# Altium PCB Dual-MCU-control-board.PcbDoc (part 2 of 3)
Units mm, origin at the board's own origin, x right, y up, seen from the top; angles counter-clockwise.
Board outline 69.24 x 57.01 mm, 4 copper layers (L1 SIGNAL, L2 GROUND, L3 GROUND, L4 SIGNAL), stack 1.571 mm thick; 90 components, 69 nets, 374 pads, 126 vias.
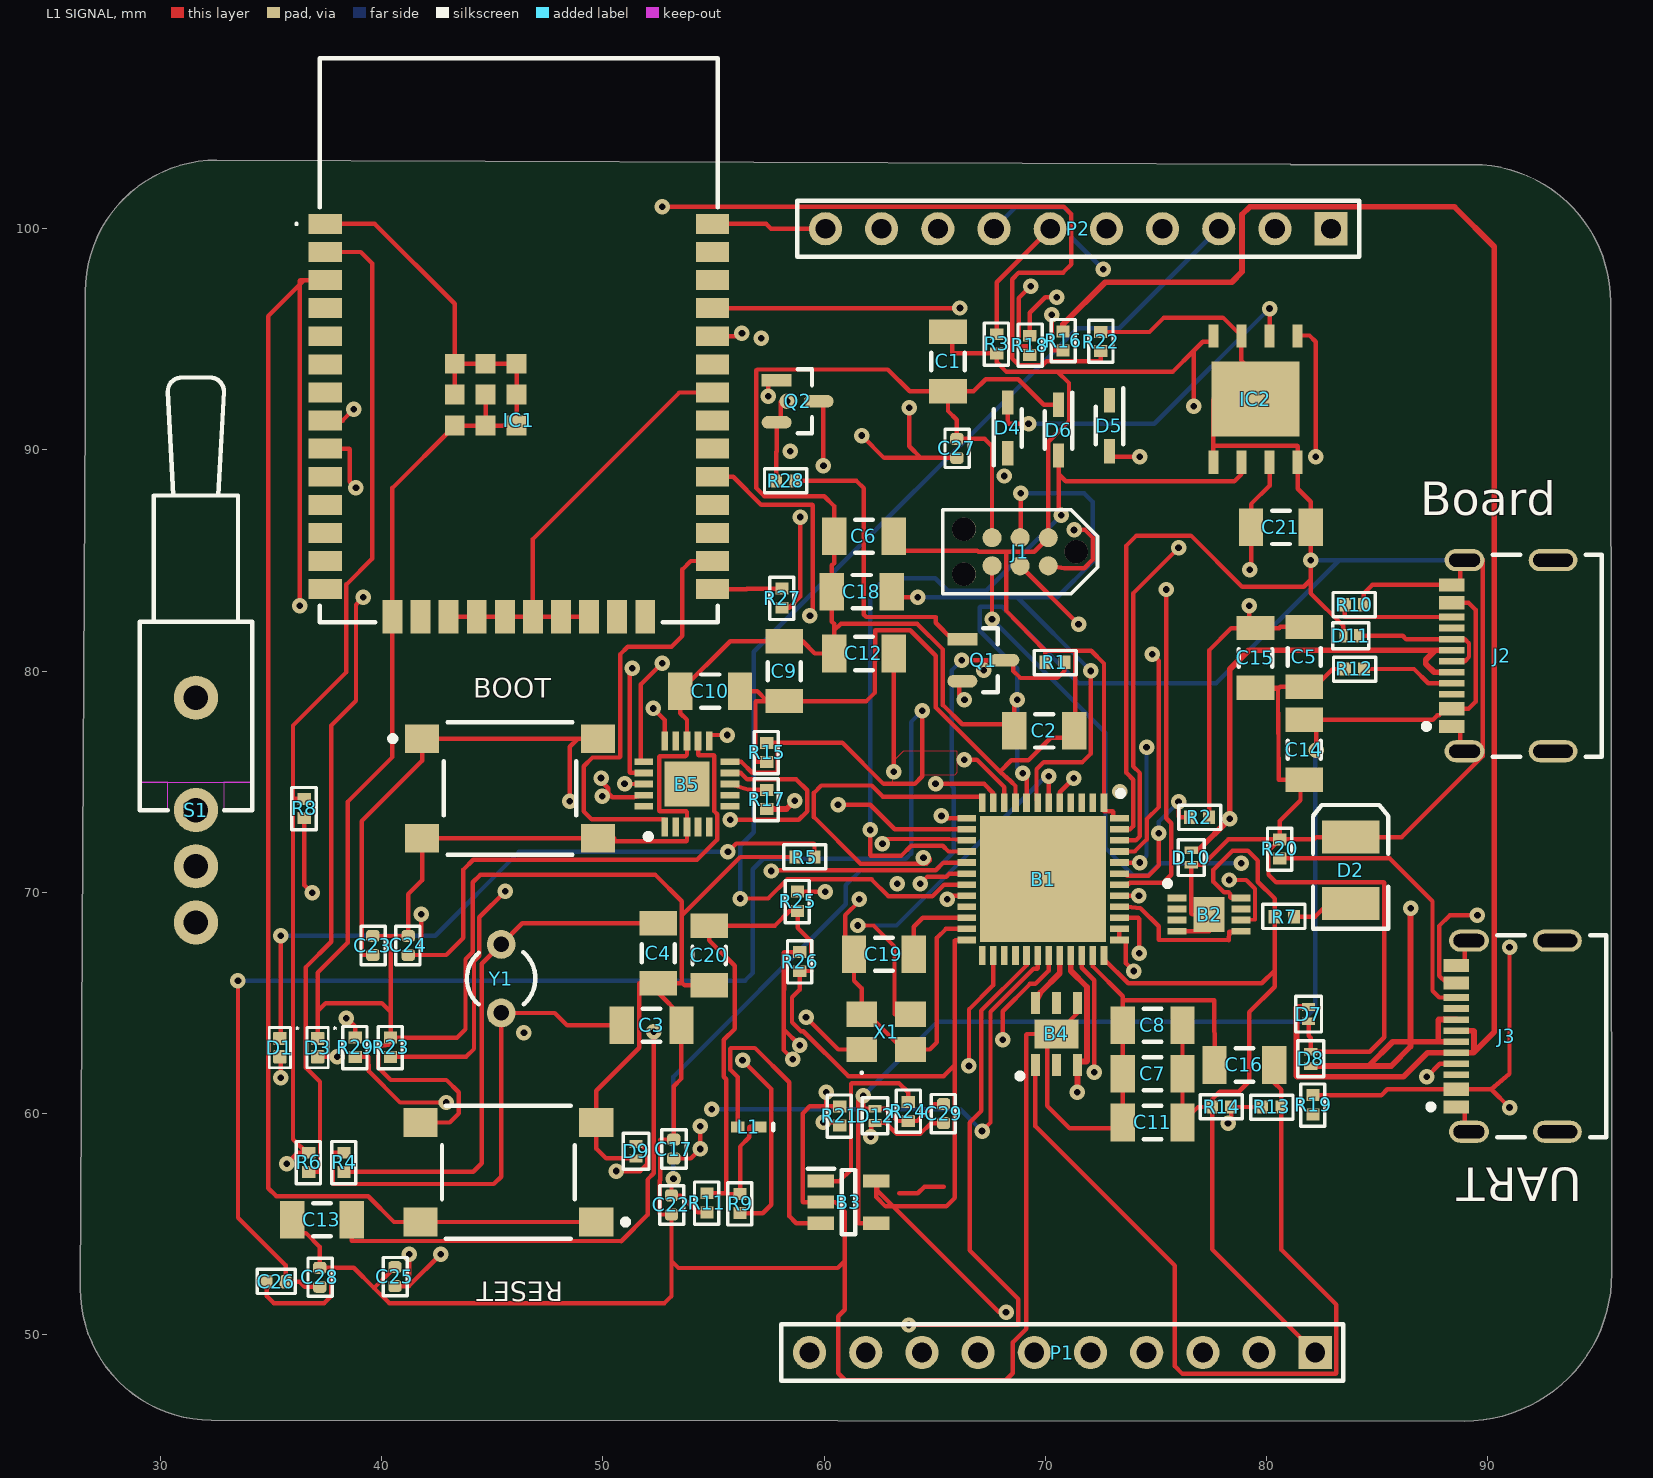
[diagram p0: L1 SIGNAL view]

## Via types
v1: diameter 0.7, hole 0.3, L1 SIGNAL to L4 SIGNAL, 126 vias

## Nets (pads, with @x,y where several pads share a name; then routed paths per layer and width w, separated by ;. In a path a pad name is that pad's centre, name@x,y a point inside that pad or via, vN(x,y) a via of type N, cw(c..) or ccw(c..) an arc to the next point about the centre after c; other vN are vias at no path point) (continued)
+3V3: (continued)
  L1 SIGNAL w0.2: v1(35.712,57.734) 36.21,58.232 R6.2@36.601,58.232 ; R8.2@36.5,74.232 36.017,74.232 35.992,74.207 ; R6.2@36.7,58.232 R6.2@36.612,58.232 ; IC1.2@37.45,98.95 39.052,98.95 39.573,98.429 39.573,85.09 38.405,83.922 38.405,79.959 35.992,77.546 35.992,74.207 ; R11.2@54.7,56.4 55.575,56.4 ; C10.2@56.2,79.1 56.972,79.1 57.422,78.65 56.921,78.65 56.896,78.625 56.896,75.925 56.921,75.9 R15.1@57.4,75.9 ; L1.1@57.1,59.4 56.642,59.4 56.617,59.375 56.617,58.928 56.2,58.511 R9.2@56.2,56.364 55.575,56.389 55.573,56.486 55.575,56.488 55.575,61.558 55.462,61.671 55.462,63.336 55.956,63.83 55.956,66.679 55.96,66.683 54.8,67.843 C20.2@54.8,68.5 57.777,68.5 58.445,69.168 R25.1@58.8,69.168 58.8,68.403 59.411,67.793 59.411,66.461 R26.1@58.9,66.436 58.9,65.608 58.547,65.255 58.547,64.135 58.953,63.729 59.055,63.729 61.087,61.697 65.405,61.697 65.913,62.205 ; C9.2@58.2,78.65 61.912,78.65 62.281,79.018 62.306,81.85 63.895,81.85 65.049,80.696 65.049,78.359 67.949,75.459 ; C6.2@63.15,86.1 63.15,85.453 66.927,85.453 66.98,85.4 68.224,85.4 ; C1.2@65.6,95.35 65.786,95.35 65.786,94.393 65.811,94.368 R3.1@67.8,94.368 67.8,93.973 68.243,93.53 70.567,93.53 ; B1.24@66.45,67.85 65.938,67.85 65.913,67.825 65.913,62.205 ; v1(68.224,51.016) 67.907,51.016 63.119,55.804 ; B1.9@68.65,74.05 68.65,74.812 68.436,75.025 67.949,75.459 ; R1.2@70,80.4 70,80.924 ; B1.36@72.65,67.15 72.65,66.98 73.742,65.888 79.781,65.888 80.368,66.474 ; B1.48@73.35,73.35 73.076,73.35 73.076,73.635 73.05,73.66 72.65,73.66 B1.1@72.65,74.05 72.65,80.347 72.072,80.924 71.349,80.924 ; C8.2@76.2,64 C7.2@76.2,61.8 C11.2@76.2,59.6 76.9,60.3 R14.1@77.536,60.3 ; v1(76.708,91.973) 76.708,94.488 ; R2.1@77.4,73.4 77.4,80.94 78.41,81.95 C15.2@79.223,81.95 ; IC2.8@77.595,95.15 77.595,94.894 77.114,94.894 76.708,94.488 ; B2.8@78.85,69.75 78.384,69.75 78.359,69.775 78.359,69.926 78.283,70.002 78.08,70.002 77.597,70.485 77.597,71.018 78.461,71.882 79.159,71.882 79.604,71.438 79.604,70.485 80.368,69.721 R7.1@80.368,68.9 80.368,66.474 ; v1(79.223,82.956) C15.2@79.223,81.95 ; C5.2@81.7,82 80.619,82 80.569,81.95 C15.2@79.5,81.95 C15.2@79.223,81.95 ; P1.1@82.2,49.2 77.536,53.864 R14.1@77.536,60.3 ; 35.992,58.852 35.992,74.207 ; 35.992,58.852 35.992,58.842 R6.2@36.601,58.232 ; 35.992,58.852 R6.2@36.612,58.232 ; R6.2@36.601,58.232 R6.2@36.612,58.232 ; 63.119,55.804 65.519,55.804 65.913,56.197 65.913,62.205 ; 63.119,55.804 62.776,55.804 62.35,56.23 B3.5@62.35,56.95 62.408,56.95 62.408,56.515 63.119,55.804 ; 67.949,75.459 68.462,75.971 69.234,75.971 70.25,76.987 71.3,76.987 C2.2@71.3,77.3 71.349,77.3 71.349,80.924 ; 68.224,85.4 69.495,85.4 J1.1@70.13,86.035 70.13,90.374 71.069,91.313 71.069,93.027 70.567,93.53 ; 68.224,85.4 68.224,82.738 70,80.924 ; 70,80.924 71.349,80.924 ; 70.567,93.53 75.75,93.53 76.708,94.488 ; R14.1@77.536,60.3 77.536,60.642 77.879,60.985 78.74,60.985 79.223,61.468 79.223,64.59 80.368,65.735 80.368,66.474
  L2 GROUND w0.2: v1(35.712,57.734) 40.538,52.908 78.492,52.908 80.702,50.698 ; v1(68.224,51.016) 68.542,50.698 80.702,50.698 ; P1.1@82.2,49.2 80.702,50.698
  L3 GROUND w0.2: v1(79.223,82.956) 76.708,85.471 v1(76.708,91.973) 82.804,85.877 P1.1@82.804,49.92 ; P1.1@82.2,49.2 82.804,49.804 P1.1@82.804,49.92 ; P2.1@82.92,100 82.92,49.92 P1.1@82.804,49.92
+5V: B4.1 C16.2 R13.1 | length 38.8
  L1 SIGNAL w0.2: B4.1@69.55,62.2 69.55,59.431 75.857,53.124 75.857,48.578 76.2,48.235 83.134,48.235 83.16,48.26 83.16,51.359 80.664,53.854 R13.1@80.664,60.3 80.664,61.087 80.35,61.401 C16.2@80.35,62.2
+5V_VBUS1: C17.1 D9.2 J3.A4B9 J3.B4A9 R19.2 | length 70.5
  L1 SIGNAL w0.2: v1(50.597,57.404) 51.689,57.404 52,57.715 52,58.318 51.694,58.625 D9.2@51.5,58.625 ; C17.1@53.2,57.97 53.973,57.97 v1(54.407,58.403) v1(54.407,59.436) ; R19.2@82.1,60.832 85.192,60.832 85.46,61.1 J3.A4B9@88.575,61.1 90.157,61.1 ; J3.B4A9@88.575,65.9 88.133,65.9 87.8,66.233 87.8,68.482 88.279,68.961 v1(89.535,68.961) ; v1(90.983,60.274) 90.157,61.1 ; v1(90.983,67.513) 90.983,61.798 90.157,61.1
  L2 GROUND w0.2: v1(50.597,57.404) 52.629,59.436 v1(54.407,59.436) ; v1(54.407,58.403) 64.271,58.403 66.142,60.274 v1(90.983,60.274) ; v1(89.535,68.961) v1(90.983,67.513)
+VCC_FTDI: B5.12 C24.2 C25.1 R13.2 R14.2 | length 84.9
  L1 SIGNAL w0.2: C25.1@40.6,52.2 41.224,52.2 41.25,52.225 ; C24.2@41.2,67.17 41.758,67.17 ; v1(41.25,53.645) 41.25,52.225 ; v1(41.783,69.012) 41.783,67.195 41.758,67.17 ; v1(42.669,53.645) 41.25,52.225 ; B5.12@54.3,76.85 54.3,76.225 54.325,76.2 55.016,76.2 55.042,76.175 55.042,73.66 55.169,73.533 55.169,72.39 54.254,71.476 44.133,71.476 43.693,71.036 43.693,67.945 42.918,67.17 41.758,67.17 ; v1(78.257,59.563) 78.4,59.706 R14.2@78.4,60.3 R13.2@79.8,60.3
  L2 GROUND w0.2: v1(42.669,53.645) 72.339,53.645 v1(78.257,59.563)
  L3 GROUND w0.2: v1(41.25,53.645) 41.25,68.478 v1(41.783,69.012)
BOOT0: B1.44 BOOT.1 BOOT.2 C23.1 | length 61
  L1 SIGNAL w0.2: C23.1@39.6,67.17 39.116,67.17 39.091,67.195 39.091,73.212 41.825,75.946 BOOT.1@41.825,76.95 48.87,76.95 ; v1(48.505,74.117) 48.505,76.585 48.87,76.95 ; BOOT.2@49.775,76.95 48.87,76.95 ; B1.44@73.35,71.35 v1(74.271,71.35)
  L2 GROUND w0.2: v1(48.505,74.117) 53.622,69 56.478,69 61.9,74.422 61.9,76.225 62.23,76.556 v1(74.574,76.556)
  L4 SIGNAL w0.2: v1(74.271,71.35) 74.574,71.653 v1(74.574,76.556)
BTN_GPIO0: Q2.3 R27.1 | length 10.5
  L1 SIGNAL w0.2: R27.1@58.1,82.868 58.42,82.868 58.928,83.376 v1(58.928,86.97) ; Q2.3@59.751,92.2 59.969,92.2 v1(59.969,89.281)
  L2 GROUND w0.2: v1(58.928,86.97) 59.969,88.011 v1(59.969,89.281)
CHIP_PU: C22.2 IC1.3 Q1.3 R1.1 R11.1 RESET.1 RESET.2 | length 146.7
  L1 SIGNAL w0.2: v1(36.297,82.956) 36.297,97.477 ; IC1.3@37.45,97.68 36.5,97.68 ; RESET.1@49.7,55.1 RESET.2@41.75,55.1 40.556,55.1 39.395,56.261 35.242,56.261 34.874,56.629 34.874,96.054 36.297,97.477 ; v1(53.188,57.048) 53.1,56.961 C22.2@53.1,56.3 53.518,56.3 54.282,55.536 R11.1@54.7,55.536 ; v1(66.225,80.5) 67.361,80.5 ; v1(67.208,80.035) 67.208,80.348 67.361,80.5 ; R1.1@70.864,80.4 70.864,80.01 70.547,79.692 68.872,79.692 68.555,80.01 68.555,80.5 Q1.3@68.151,80.5 67.361,80.5 ; 36.297,97.477 36.5,97.68 ; 36.297,97.477 36.297,97.655 36.322,97.68 36.5,97.68
  L2 GROUND w0.2: v1(36.297,82.956) 37.236,83.896 64.795,83.896 67.208,81.483 v1(67.208,80.035)
  L4 SIGNAL w0.2: v1(53.188,57.048) 53.188,61.671 60.981,69.465 60.981,70.333 61.663,71.014 65.049,71.014 65.862,71.827 65.862,74.727 65.761,74.828 65.761,80.035 v1(66.225,80.5)
CON1_USB_N: D7.2 J3.A7 J3.B7 R16.1 | length 75
  L1 SIGNAL w0.26: R16.1@70.8,95.364 70.8,95.682 72.705,97.587 78.422,97.587 78.892,98.057 78.892,100.647 79.235,100.99 88.494,100.99 90.297,99.187 90.297,63.69 89.383,62.775 ; D7.2@81.9,64.825 81.382,64.825 81.356,64.8 81.356,61.697 81.382,61.671 86.196,61.671 87.274,62.75 J3.B7@88.575,62.75 89.357,62.75 89.383,62.775 ; J3.A7@88.575,63.75 89.357,63.75 89.383,63.725 89.383,62.775
CON1_USB_P: D8.2 J3.A6 J3.B6 R17.1 | length 51.6
  L1 SIGNAL w0.26: R17.1@57.4,73.768 58.299,73.768 v1(58.674,74.143) ; D8.2@82,62.15 84.607,62.15 ; v1(86.512,69.291) 86.512,63.25 ; J3.A6@88.575,63.25 87.782,63.25 ; J3.B6@88.575,64.25 87.782,64.25 87.757,64.225 87.757,63.275 87.782,63.25 ; 84.607,62.15 85.632,62.15 86.512,63.03 86.512,63.25 ; 84.607,62.15 85.707,63.25 86.512,63.25 ; 86.512,63.25 87.782,63.25
  L2 GROUND w0.381: v1(58.674,74.143) 58.674,74.676 61.087,77.089 65.151,77.089 65.329,77.267 78.537,77.267 v1(86.512,69.291)